# Altium PCB PCB3.PcbDoc
Units mil, origin at the board's own origin, x right, y up, seen from the top; angles counter-clockwise.
Board outline 2126.15 x 984.42 mil, 2 copper layers (Top Layer, Bottom Layer); 19 components, 36 nets, 124 pads, 44 vias.
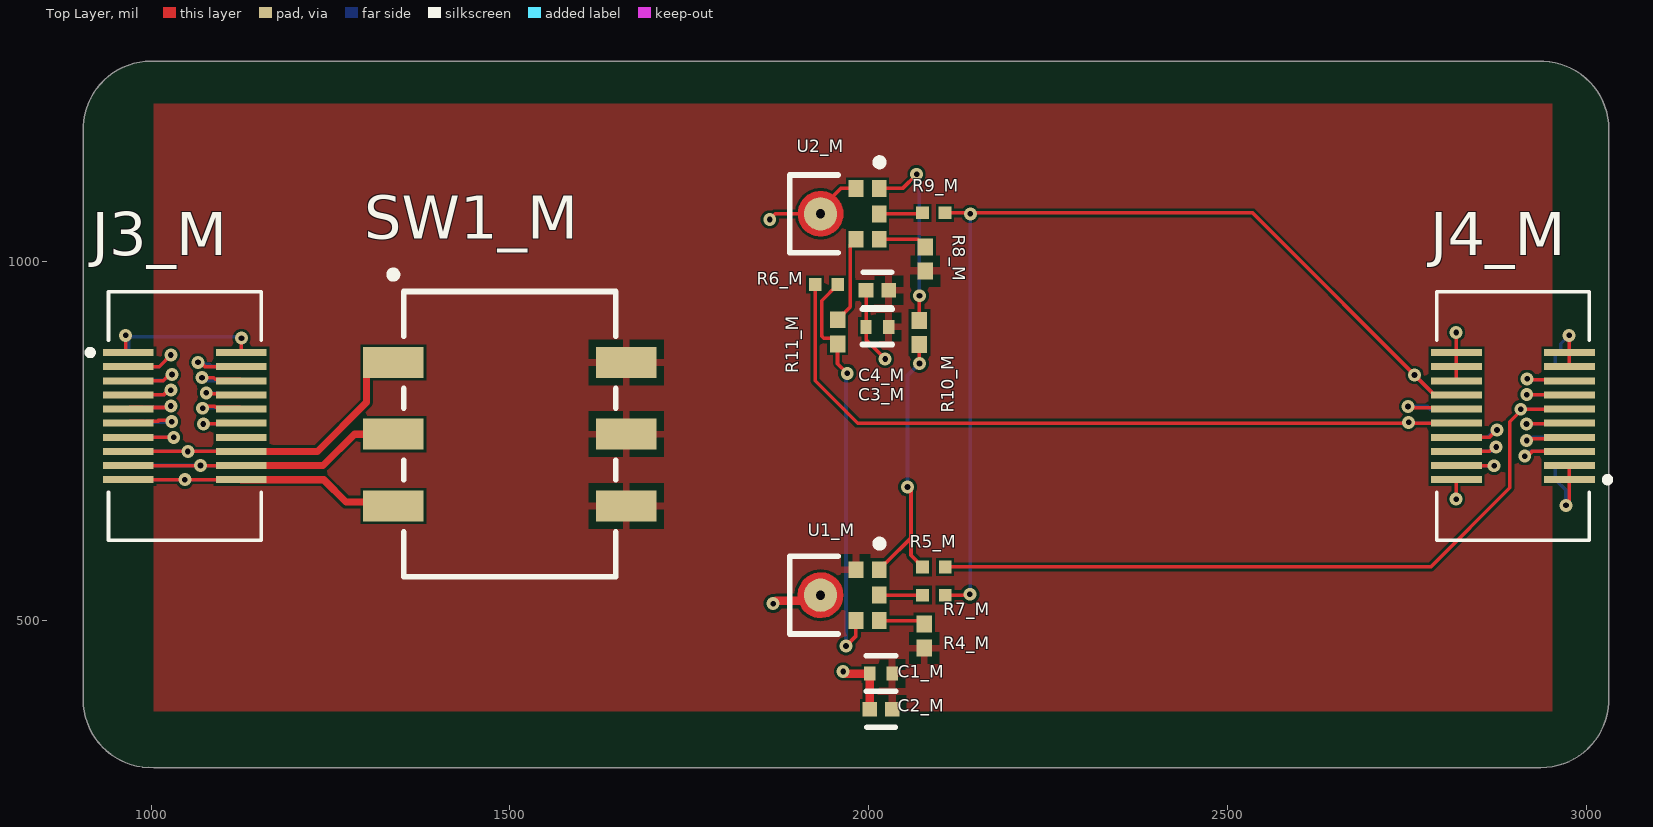
[diagram p0: Top Layer view]
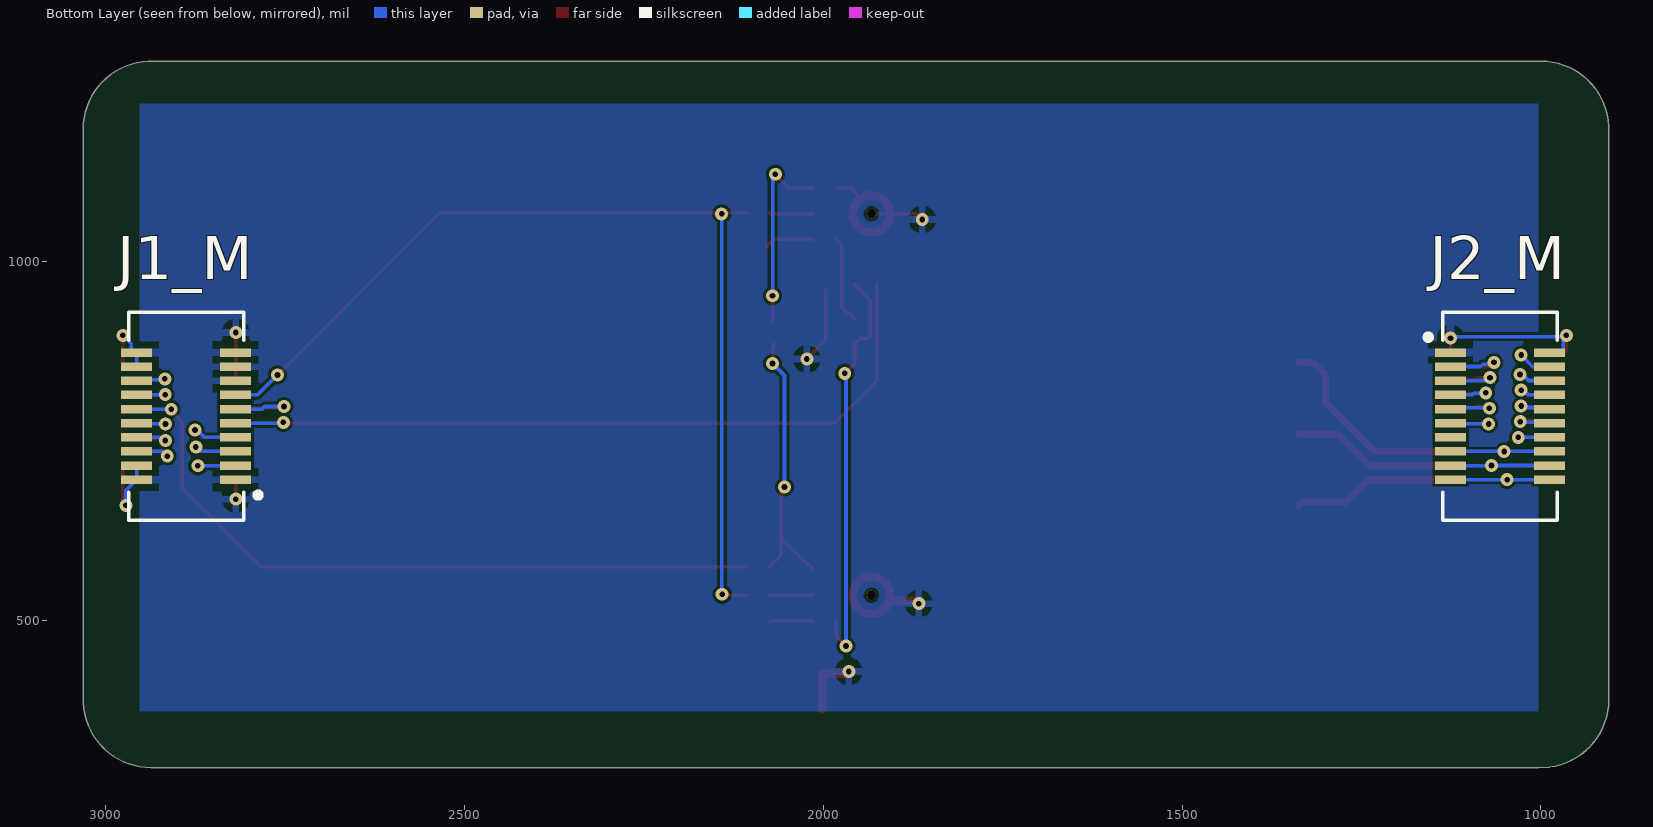
[diagram p1: Bottom Layer view, seen from below]

## Layer stack, top to bottom
Top Solder: solder mask 0.4, Solder Resist, Dk 3.5
Top Layer: signal copper 1.4
Dielectric 1: dielectric 12.6, FR-4, Dk 4.8
Bottom Layer: signal copper 1.4
Bottom Solder: solder mask 0.4, Solder Resist, Dk 3.5

## Board outline
905.51,389.85 905.51,1181.1 cw(c1000,1185.04) 1000,1279.61 2932.99,1279.61 2933.07,1279.53 cw(c2937.01,1185.04) 3031.58,1185.04 3031.58,393.78 3031.5,393.7 cw(c2937.01,389.76) 2937.01,295.19 1004.02,295.19 1003.94,295.28 cw(c1000,389.76)

## Design rules (kind name [scope] priority, off if disabled: settings)
Clearance [All] p1: gap=4 ignorepadtopadclearanceinfootprint=FALSE
PolygonConnect [All] p1: connectstyle=Relief reliefconductorwidth=10 reliefentries=4 polygonreliefangle="90 Angle" airgapwidth=10
RoutingVias [All] p1: holewidth=8 width=18 viastyle="Through Hole" minholewidth=8 minwidth=18 maxholewidth=28 maxwidth=50
SolderMaskExpansion [All] p1: expansion=4 istentingtop=FALSE
Width [All] p1: maxlimit=50 minlimit=4 preferedwidth=5
30 further rules are at their usual default settings.

## Classes and differential pairs
component class Sheet2: C1_M C2_M C3_M C4_M J1_M J2_M J3_M J4_M R4_M R5_M R6_M R7_M R8_M R9_M R10_M R11_M U1_M U2_M

## Components (designator, comment, footprint, x,y, rotation, side; value= is the part's Value field where it differs from the comment)
C1_M "GRM155R71C104KA88D" FP-GRM15-MFG 2017.18,426.2 r0 top value=0.10μF
C2_M "C0402C201J5GACTU" FP-C0402-BB-MFG 2017.39,376.62 r180 top value="200 pF"
C3_M "GRM155R71C104KA88D" FP-GRM15-MFG 2012.2,909.45 r0 top value=0.10μF
C4_M "C0402C201J5GACTU" FP-C0402-BB-MFG 2012.2,960.63 r180 top value="200 pF"
J1_M "0539160208" "MOLEX-  539160208" 2898,785 r90 bottom
J2_M "0539160208" "MOLEX-  539160208" 1047,785 r270 bottom
J3_M "0529910208" MOLEX_52991-0208 1047,785 r270 top
J4_M "0529910208" MOLEX_52991-0208 2898,785 r90 top
R4_M "0R" RESC1005X40X25NL05T10 2077.69,478.39 r90 top
R5_M "51R" RESC1005X40X25LL05T05 2090.94,574.8 r0 top
R6_M "51R" RESC1005X40X25LL05T05 1941.34,968.5 r180 top
R7_M "51R" RESC1005X40X25LL05T05 2090.94,535.43 r0 top
R8_M "0R" RESC1005X40X25NL05T10 2079.13,1003.94 r90 top
R9_M "51" RESC1005X40X25LL05T05 2090.78,1068.26 r0 top
R10_M "0R" RESC1005X40X25NL05T10 2070.87,901.57 r270 top
R11_M "0R" RESC1005X40X25NL05T10 1956.69,902.56 r270 top
SW1_M "A6SN-3101" FP-A6SN-3101-MFG 1500,759.84 r270 top
U1_M "SPH0645LM4H-B" FP-SPH0645LM4H-B-MFG#1 1961.02,535.43 r270 top
U2_M "SPH0645LM4H-B" FP-SPH0645LM4H-B-MFG#2 1961.02,1066.93 r270 top

## Footprints (in the part's own frame and the unit in brackets; to place one, negate y for a bottom-side part, rotate by r counter-clockwise, add the part's x,y. Pads: shape width x height; smd on the part's side, far side on the other; paste and mask are expansions set on the pad)
FP-A6SN-3101-MFG [mm]
  rect 1.1x2.15 smd paste+0 mask+0: 1(-2.54,-4.125) 2(0,-4.125) 3(2.54,-4.125) 4(2.54,4.125) 5(0,4.125) 6(-2.54,4.125)
  silkscreen extent -5.77,-4.25 5.05,3.75, body extent -5.15,-5.3 5.15,5.3, height 0.25
FP-C0402-BB-MFG [mm]
  rect 0.52x0.52 smd paste+0 mask+0: 1(-0.4,0) 2(0.4,0)
  silkscreen extent -0.5,-0.64 0.5,0.64, body extent -0.8,-0.4 0.8,0.4, height 0.25
FP-GRM15-MFG [mm]
  rect 0.4x0.5 smd paste+0 mask+0: 1(-0.4,0) 2(0.4,0)
  silkscreen extent -0.53,-0.63 0.53,0.63, body extent -0.7,-0.38 0.7,0.38, height 0.25
FP-SPH0645LM4H-B-MFG#1 [mm]
  rect 0.6x0.522 smd paste+0 mask+0: 1(-0.9,1.364) 2(-0.9,0.542) 4(0.9,0.542) 5(0.9,1.364) 6(0,1.364)
  round 1.177 smd paste-1000 mask-1000: 3(0,-0.71)
  round 0.325 hole 0.325 unplated paste-1000 mask+0: ""(0,-0.71)
  Top Layer circle w0.3: c0,-0.71 r0.662
  silkscreen extent -1.95,-1.8 1.38,1.5
FP-SPH0645LM4H-B-MFG#2 [mm]
  rect 0.6x0.522 smd paste+0 mask+0: 1(-0.9,1.364) 2(-0.9,0.542) 4(0.9,0.542) 5(0.9,1.364) 6(0,1.364)
  round 1.177 smd paste-1000 mask-1000: 3(0,-0.71)
  round 0.325 hole 0.325 unplated paste-1000 mask+0: ""(0,-0.71)
  Top Layer lines w0.3: 0,-1.372 cw(c0,-0.71) -0.551,-0.343 cw(c0,-0.71) 0,-0.048 cw(c0,-0.71) 0,-1.372
  silkscreen extent -1.95,-1.8 1.38,1.5
"MOLEX-  539160208" [mm]
  rect 0.3x1.1 smd: 1(-2.25,1.5) 2(-2.25,-2) 3(-1.75,1.5) 4(-1.75,-2) 5(-1.25,1.5) 6(-1.25,-2) 7(-0.75,1.5) 8(-0.75,-2) 9(-0.25,1.5) 10(-0.25,-2) 11(0.25,1.5) 12(0.25,-2) 13(0.75,1.5) 14(0.75,-2) 15(1.25,1.5) 16(1.25,-2) 17(1.75,1.5) 18(1.75,-2) 19(2.25,1.5) 20(2.25,-2)
  silkscreen extent -3.68,-2.89 3.68,1.78, body extent -3.65,-2.3 3.65,1.8, height 3.46
MOLEX_52991-0208 [mm]
  rect 0.25x1.8 smd: 1(-2.25,-2) 2(-2.25,2) 3(-1.75,-2) 4(-1.75,2) 5(-1.25,-2) 6(-1.25,2) 7(-0.75,-2) 8(-0.75,2) 9(-0.25,-2) 10(-0.25,2) 11(0.25,-2) 12(0.25,2) 13(0.75,-2) 14(0.75,2) 15(1.25,-2) 16(1.25,2) 17(1.75,-2) 18(1.75,2) 19(2.25,-2) 20(2.25,2)
  silkscreen extent -4.4,-3.45 4.4,2.7, body extent -4.4,-2.7 4.4,2.7, height 2.28
RESC1005X40X25LL05T05 [mm] "Chip Resistor, 2-Leads, Body 1.00x0.50mm, IPC High Density"
  rect 0.45x0.45 smd: 1(-0.4,0) 2(0.4,0)
  body extent -0.53,-0.27 0.53,0.28, height 0.4
RESC1005X40X25NL05T10 [mm] "Chip Resistor, 2-Leads, Body 1.00x0.50mm, IPC Medium Density"
  rect 0.6x0.55 smd: 1(-0.425,0) 2(0.425,0)
  body extent -0.53,-0.27 0.53,0.28, height 0.4

## Part data
C1_M C3_M: library part CMP-2100-03641-2, "CAP CER 0.1UF 16V X7R 0402", Capacitance=0.10μF, Manufacturer=Murata, Package=GRM15, Temperature="-55°C to +125°C", Temperature Characteristic=X7R, Temperature Range High=+125°C, Temperature Range Low=-55°C, Tolerance=10%, Voltage Rating=16Vdc, Category=Cap, ComponentLink2Description=Datasheet, ComponentLink2URL=https://search.murata.co.jp/Ceramy/image/img/A01X/G101/ENG/GRM155R71H471KA01-01A.pdf, Device Class L1="Passive Components", Device Class L2=Capacitors, Device Class L3="Ceramic Capacitors", Digikey Description="CAP CER 0.1UF 16V X7R 0402", Height=0.55mm, Ipc Land Pattern Name=CAPC10050X219, Lead Free=yes, Manufacturer Part Number=GRM155R71C104KA88D, Material=Ceramic, Mouser Description="0402 0.1 uF 16V ±10 % Tolerance X7R SMT Multilayer Ceramic Capacitor", Octopart=https://octopart.com/grm155r71c104ka88d-murata-196880, RoHS=TRUE, Standoff Height=0mm
C2_M C4_M: library part CMP-1034-01347-3, "CAP CER 200PF 50V NP0 0402", Capacitance="200 pF", Manufacturer=Kemet, Package=C0402-BB, Temperature="-55°C to +125°C", Temperature Characteristic=C0G, Temperature Coefficient=15%, Temperature Range High=+125°C, Temperature Range Low=-55°C, Tolerance=0.05, Voltage Rating="50 V", Automotive=No, Category=Cap, ComponentLink2Description=Datasheet, ComponentLink2URL=https://content.kemet.com/datasheets/KEM_C1002_X7R_SMD.pdf, Device Class L1="Passive Components", Device Class L2=Capacitors, Device Class L3="Ceramic Capacitors", Digikey Description="CAP CER 200PF 50V NP0 0402", Height=0.55mm, Ipc Land Pattern Name=CAPC10050X50, Lead Free=Yes, Manufacturer Part Number=C0402C201J5GACTU, Material=Ceramic, Mouser Description="Cap Ceramic 200pF 50V C0G 5% SMD 0402 125°C Punched Paper T/R", Octopart=https://octopart.com/c0402c201j5gactu-kemet-19049754, RoHS=TRUE
J1_M J2_M: library part 53916-0208
J3_M J4_M: library part 52991-0208, "20 Position Connector Receptacle, Center Strip Contacts Surface Mount Gold", Package=None, Availability=Unavailable, MF=Molex, MP=52991-0208, Price=None, SnapEDA_Link=https://www.snapeda.com/parts/52991-0208/Molex/view-part/230631/?ref=snap
R4_M R8_M R10_M R11_M: library part CMP-1011-00001-2, Manufacturer="Yageo / Phycomp", Part Number=RC0402JR-070RL
R5_M R6_M R7_M R9_M: library part CMP-2002-00977-1, Manufacturer=Panasonic, Part Number=ERJ-2RKF51R0X
SW1_M: library part CMP-08827-000007-1, "SWITCH SLIDE DIP SPST 25MA 24V", Ambient Temperature Range High=+85°C, Ambient Temperature Range Low=-30°C, Contact Resistance=200mΩ, Current Rating=25mA, Manufacturer="Omron Electronics Inc-EMC Div", Temperature="-30°C to +85°C", Voltage Rating Dc=24V, Automotive=No, Category=Switch, ComponentLink2Description=Datasheet, ComponentLink2URL=https://omronfs.omron.com/en_US/ecb/products/pdf/en-a6sn.pdf, Device Class L1=Electromechanical, Device Class L2=Switches, Device Class L3="DIP Switches", Digikey Description="SWITCH SLIDE DIP SPST 25MA 24V", Electromechanical Life=1000Cycles, Height=4.55mm, Lead Free=Yes, Manufacturer Part Number=A6SN-3101, Mouser Description="DIP Switches / SIP Switches 3P Knife-Edge, 2.3mm Slide SMT Flat-Act", Number Of Circuits=3, Octopart=https://octopart.com/a6sn-3101-omron-55396000, Package=A6SN-3101, RoHS=TRUE, Standoff Height=0.7mm, Temperature Range High=+85°C, Temperature Range Low=-30°C, Throw Configuration=SPST
U1_M U2_M: library part CMP-95043-000001-1, "MICROPHONE MEMS DIGITAL I2S OMNI", Operating Supply Current=600uA, Voltage Rating=1.8V, Direction=Omnidirectional, Height=1.08mm, Length=3.5mm, Output Type=Digital, Packaging="Tape and Reel", Shape=Rectangular, Termination=Solder, Width=2.65mm

## Via types
v1: diameter 18, hole 8, Top Layer to Bottom Layer, 32 vias
v2: diameter 18, hole 8, Top Layer to Bottom Layer, tented both sides, 12 vias

## Nets (pads, with @x,y where several pads share a name; then routed paths per layer and width w, separated by ;. In a path a pad name is that pad's centre, name@x,y a point inside that pad or via, vN(x,y) a via of type N, cw(c..) or ccw(c..) an arc to the next point about the centre after c; other vN are vias at no path point)
AIN6: J2_M.8 J3_M.8 | length 100.1
  Top Layer w5: v1(1076.9,817.43) 1078.35,815.98 1124.29,815.98 J3_M.8
  Bottom Layer w5: v1(1076.9,817.43) 1077.3,817.03 1093.4,817.03 1095.9,814.53 J2_M.8
AIN7: J2_M.9 J3_M.9 | length 102.5
  Top Layer w5: J3_M.9 970.44,797.03 1025.37,797.03 v1(1027.56,799.21)
  Bottom Layer w5: J2_M.9 990.13,797.03 1025.37,797.03 v1(1027.56,799.21)
GND: C1_M.1 C2_M.2 C3_M.1 C4_M.2 J1_M.1 J1_M.2 J1_M.3 J1_M.16 J1_M.17 J1_M.18 J1_M.19 J1_M.20 J2_M.1 J2_M.2 J3_M.1 J3_M.2 J4_M.1 J4_M.2 J4_M.3 J4_M.16 J4_M.17 J4_M.18 J4_M.19 J4_M.20 U1_M.3 U2_M.2 U2_M.3 | length 914
  Top Layer w5: v1(964.57,897.64) 964.57,876 966.99,873.58 J3_M.1 ; J3_M.2 1125.74,893.46 v1(1125.98,893.7) ; v2(1862.2,1059.06) 1870.08,1066.93 1907.01,1066.93 U2_M.3 ; 1947.53,1088.61 1961.28,1102.36 U2_M.2 ; C4_M.2 C3_M.1 1996.46,891.31 v2(2023.08,864.69) ; v1(2818.9,669.29) 2818.9,696.06 J4_M.2 ; v1(2818.9,901.57) 2818.9,873.94 J4_M.20 J4_M.18 J4_M.16 ; v1(2972,660.64) 2976.74,665.38 J4_M.1 J4_M.3 ; v1(2976.38,897.64) 2976.74,897.28 J4_M.19 J4_M.17
  Top Layer w11.81: v2(1867,523.68) 1870.88,527.56 1905.51,527.56 ; v2(1964.57,429.13) 1967.5,426.2 C1_M.1 2001.54,426.1 2001.54,376.72 C2_M.2
  Bottom Layer w5: J2_M.1 972.2,873.58 968.79,876.99 968.79,889.9 964.57,894.12 v1(964.57,897.64) 966.54,895.67 1124.02,895.67 v1(1125.98,893.7) ; J1_M.3 J1_M.1 2972,681.47 v1(2972,660.64) ; J1_M.17 J1_M.19 2961.31,873.58 2964.71,876.99 2964.71,885.97 v1(2976.38,897.64)
I2C0_SCL: J1_M.12 J4_M.12 | length 137.7
  Top Layer w5: v1(2751.89,798.36) 2753.65,796.6 2817.5,796.6 J4_M.12
  Bottom Layer w5: v1(2751.89,798.36) 2778.95,798.36 2782.46,794.84 J1_M.12
I2C0_SDA: J1_M.13 J4_M.13 | length 99.5
  Top Layer w5: v1(2917.32,814.96) 2917.54,814.74 2976.52,814.74 J4_M.13
  Bottom Layer w5: v1(2917.32,814.96) 2917.54,814.74 2956.84,814.74 J1_M.13
I2C1_SCL: J2_M.10 J3_M.10 | length 111.5
  Top Layer w5: v1(1071.84,796.02) 1074.33,798.5 1083.74,798.5 1083.81,798.57 1088.94,798.57 1090.25,797.26 1123.32,797.26 J3_M.10
  Bottom Layer w5: v1(1071.84,796.02) 1072.53,796.71 1123.88,796.71 J2_M.10
I2C1_SDA: J2_M.11 J3_M.11 | length 106.7
  Top Layer w5: J3_M.11 970.68,777.58 1009.11,777.58 1011.06,779.53 1026.55,779.53 v1(1028.83,777.25)
  Bottom Layer w5: J2_M.11 990.91,778.12 992.82,776.2 1027.79,776.2 v1(1028.83,777.25)
I2S_CLKEXT: J2_M.3 J3_M.3 | length 112.3
  Top Layer w5: J3_M.3 1011.38,853.9 v1(1027.56,870.08)
  Bottom Layer w5: J2_M.3 1011.38,853.9 v1(1027.56,870.08)
I2S_SCK: J1_M.10 J4_M.10 R6_M.2 | length 1119.5
  Top Layer w5: R6_M.2 1925.59,834.25 1984.69,775.16 J4_M.10
  Bottom Layer w5: v1(2752.66,776.37) 2753.87,775.16 J1_M.10
I2S_SDI: J1_M.14 J4_M.14 R7_M.2 R9_M.2 | length 1453.1
  Top Layer w5: R9_M.2 2535.01,1068.26 2788.75,814.53 J4_M.14 ; R7_M.2 2139.81,535.43 v2(2141.07,536.69)
  Bottom Layer w5: v2(2141.07,536.69) 2141.4,537.02 2141.4,1066.6 v2(2141.73,1066.93) ; v1(2760.98,842.43) 2788.88,814.53 J1_M.14
I2S_SDO: J1_M.15 J4_M.15 | length 100.3
  Top Layer w5: v1(2917.88,836.95) 2919.25,835.58 2975.37,835.58 J4_M.15
  Bottom Layer w5: v1(2917.88,836.95) 2919.25,835.58 2955.68,835.58 J1_M.15
I2S_WS: J1_M.11 J4_M.11 R5_M.2 | length 1064.5
  Top Layer w5: R5_M.2 2783.46,574.8 2893.7,685.04 2893.7,777.32 2908.93,792.55 v1(2908.93,794.63) ; v1@2909.02,794.84 J4_M.11
  Bottom Layer w5: v1(2908.93,794.63) 2909.03,794.73 2956.95,794.73 J1_M.11
NetR4_M_2: R4_M.2 U1_M.5 | length 65
  Top Layer w5: U1_M.5 2072.82,500 R4_M.2
NetR5_M_1: R5_M.1 R10_M.2 U1_M.1 | length 394.7
  Top Layer w5: U1_M.1 2014.72,572.4 2022.5,580.18 2024.04,580.18 2059.06,615.2 ; v2(2054.27,686.08) 2059.06,681.3 2059.06,615.2 ; R10_M.2@2066.93,884.84 R10_M.2@2070.87,880.91 ; v2(2070.87,858.27) R10_M.2@2070.87,880.91 ; R10_M.2 R10_M.2@2070.87,880.91 ; R5_M.1 2059.06,590.94 2059.06,615.2
  Bottom Layer w5: v2(2054.27,686.08) 2054.27,841.67 v2(2070.87,858.27)
NetR6_M_1: R6_M.1 R11_M.2 U1_M.4 | length 576.5
  Top Layer w5: R6_M.1 1934.59,946.01 1934.59,896.63 1937.52,893.7 1948.82,893.7 R11_M.2 1956.69,858.16 v2(1970.2,844.65) ; v2(1968.5,464.57) 1982.36,478.43 U1_M.4
  Bottom Layer w5: v2(1968.5,464.57) 1968.5,842.95 v2(1970.2,844.65)
NetR7_M_1: R7_M.1 U1_M.6 | length 60.5
  Top Layer w5: U1_M.6 R7_M.1
NetR8_M_2: R8_M.2 U2_M.5 | length 69.5
  Top Layer w5: U2_M.5 2069.29,1031.5 2079.13,1021.65 R8_M.2
NetR9_M_1: R9_M.1 U2_M.6 | length 60.9
  Top Layer w5: U2_M.6 2073.7,1066.93 R9_M.1
NetR10_M_1: R10_M.1 U2_M.1 | length 265.7
  Top Layer w5: U2_M.1 2047.24,1102.36 v2(2066.93,1122.05) ; R10_M.1 v2(2070.87,952.76)
  Bottom Layer w5: v2(2066.93,1122.05) 2070.87,1118.11 v2(2070.87,952.76)
NetR11_M_1: R11_M.1 U2_M.4 | length 123.4
  Top Layer w5: R11_M.1 1956.69,920.28 1965.02,928.6 1966,928.6 1974.59,937.19 1974.59,1023.72 U2_M.4
PDOWN: J2_M.12 J3_M.12 | length 106.9
  Top Layer w5: v1(1072.77,774.04) 1073.33,774.6 1125.18,774.6 J3_M.12
  Bottom Layer w5: v1(1072.77,774.04) 1073.33,774.6 1125.18,774.6 J2_M.12
QSPI0_MISO: J1_M.6 J4_M.6 | length 116.1
  Top Layer w5: J4_M.6 2864.87,735.79 2871.17,742.08 v1(2874.68,742.08)
  Bottom Layer w5: J1_M.6 2868.39,735.79 v1(2874.68,742.08)
QSPI0_MOSI: J1_M.5 J4_M.5 | length 110.2
  Top Layer w5: v1(2914.52,729.22) 2918.04,729.22 2924.6,735.79 J4_M.5
  Bottom Layer w5: v1(2914.52,729.22) 2921.09,735.79 J1_M.5
QSPI0_SCK: J1_M.7 J4_M.7 | length 103
  Top Layer w5: v1(2917.19,751.15) 2919.35,753.31 2974.58,753.31 J4_M.7
  Bottom Layer w5: v1(2917.19,751.15) 2920.71,751.15 2925.03,755.47 J1_M.7
QSPI0_SDIO2: J1_M.8 J4_M.8 | length 121.4
  Top Layer w5: J4_M.8 2865.39,755.47 v1(2875.69,765.78)
  Bottom Layer w5: J1_M.8 2862.67,755.47 2872.97,765.78 v1(2875.69,765.78)
QSPI0_SDIO3: J1_M.9 J4_M.9 | length 100.5
  Top Layer w5: v1(2917.07,774.12) 2917.59,774.64 2976.22,774.64 J4_M.9
  Bottom Layer w5: v1(2917.07,774.12) 2917.59,774.64 2956.54,774.64 J1_M.9
QSPI0_SS0: J1_M.4 J4_M.4 | length 105.5
  Top Layer w5: J4_M.4 2871.67,716.1 v1(2871.91,715.86)
  Bottom Layer w5: J1_M.4 2819.38,715.98 2871.79,715.98 v1(2871.91,715.86)
SQWOUT: J2_M.13 J3_M.13 | length 107.1
  Top Layer w5: J3_M.13 968.48,755.69 1031.29,755.69 v1(1031.56,755.42)
  Bottom Layer w5: J2_M.13@987.97,755.45 v1@1031.53,755.45
UART0_CTS: J2_M.5 J3_M.5 | length 109.7
  Top Layer w5: J3_M.5 1016.82,834.21 1025.75,843.15 v1(1029.27,843.15)
  Bottom Layer w5: J2_M.5 988.38,834.65 1017.25,834.65 1025.75,843.15 v1(1029.27,843.15)
UART0_RTS: J2_M.4 J3_M.4 | length 125.4
  Top Layer w5: v1(1065.53,859.93) 1069.05,859.93 1075.08,853.9 J3_M.4
  Bottom Layer w5: v1(1065.53,859.93) 1068.02,857.44 1081.21,857.44 1084.53,854.11 1125.52,854.11 J2_M.4
UART0_RX: J2_M.7 J3_M.7 | length 104.5
  Top Layer w5: J3_M.7 1017.36,814.53 1024.04,821.21 v1(1027.56,821.21)
  Bottom Layer w5: J2_M.7 1017.36,814.53 1024.04,821.21 v1(1027.56,821.21)
UART0_TX: J2_M.6 J3_M.6 | length 113.4
  Top Layer w5: v1(1070.87,838.58) 1087.37,838.58 1089.31,836.63 1123.32,836.63 J3_M.6
  Bottom Layer w5: v1(1070.87,838.58) 1074.38,838.58 1078.75,834.21 J2_M.6
VCC: C1_M.2 C2_M.1 C3_M.2 C4_M.1 R4_M.1 R8_M.1 SW1_M.4 SW1_M.5 SW1_M.6 U1_M.2
VCC_1: J2_M.15 J2_M.16 J3_M.15 J3_M.16 SW1_M.1 | length 581.3
  Top Layer w5: J3_M.15 v1(1051.18,735.79) J3_M.16
  Top Layer w10: J3_M.16 1231.85,735.79 1300.38,804.31 1300.38,843.19 1317.03,859.84 SW1_M.1
  Bottom Layer w5: J2_M.15 v1(1051.18,735.79) J2_M.16
VCC_2: J2_M.17 J2_M.18 J3_M.17 J3_M.18 SW1_M.2 | length 525.3
  Top Layer w5: J3_M.17 1068.9,716.1 J3_M.18
  Top Layer w10: J3_M.18 1239.72,716.1 1283.46,759.84 SW1_M.2
  Bottom Layer w5: J2_M.17 987.99,716.14 1068.86,716.14 v1(1068.9,716.18) 1068.98,716.1 J2_M.18
VCC_3: J2_M.19 J2_M.20 J3_M.19 J3_M.20 SW1_M.3 | length 522.3
  Top Layer w5: J3_M.19 v1(1047,696.42) J3_M.20
  Top Layer w10: J3_M.20 1240.59,696.42 1271.65,665.35 1332.09,665.35 SW1_M.3
  Bottom Layer w5: J2_M.19 v1(1047,696.42) J2_M.20
pads on no net: J2_M.14 J3_M.14 U1_M. U2_M.

## Polygon pours and split planes (outlines as drawn)
GND on Bottom Layer "GND_L02_P000" (solid, pour order 0): 1003.94,1220.47 1003.94,374.02 2952.76,374.02 2952.76,1220.47
VCC on Top Layer "VCC_L01_P001" (solid, pour order 1): 2952.76,1220.47 2952.76,374.02 1003.94,374.02 1003.94,1220.47

## Silkscreen, mask and mechanical layers (free items; w line width, h text height)
Mechanical 1:
  lines w1: 905.43,389.76 ccw(c1000,389.76) 1003.94,295.28 ; 905.51,1181.1 cw(c1000,1185.04) 1000,1279.61 2932.99,1279.61 ; 1004.02,295.19 2937.01,295.19 ccw(c2937.01,389.76) 3031.5,393.7 ; 2933.07,1279.53 cw(c2937.01,1185.04) 3031.58,1185.04 3031.58,393.78